# Altium PCB HandChip.PcbDoc
Units mil, origin at the board's own origin, x right, y up, seen from the top; angles counter-clockwise.
Board outline 3000 x 2000 mil, 2 copper layers (Top Layer, Bottom Layer); 30 components, 21 nets, 120 pads, 76 vias.
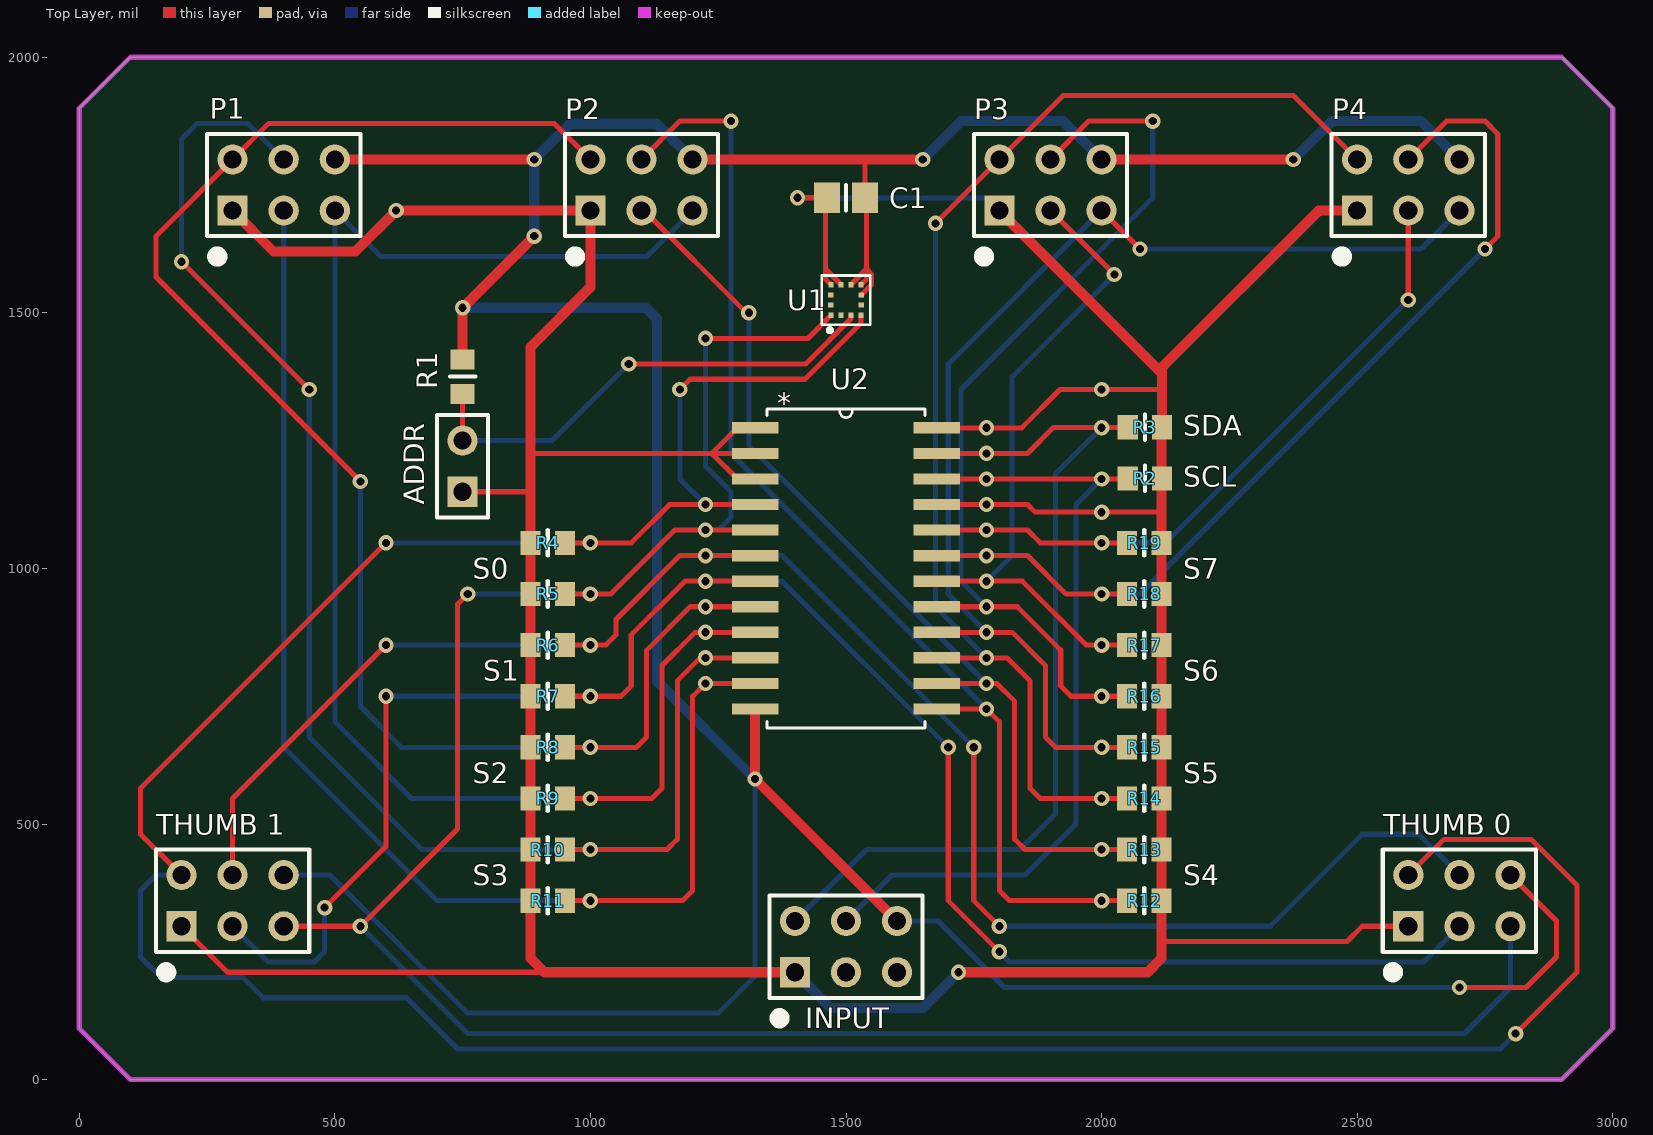
[diagram p0: Top Layer view]
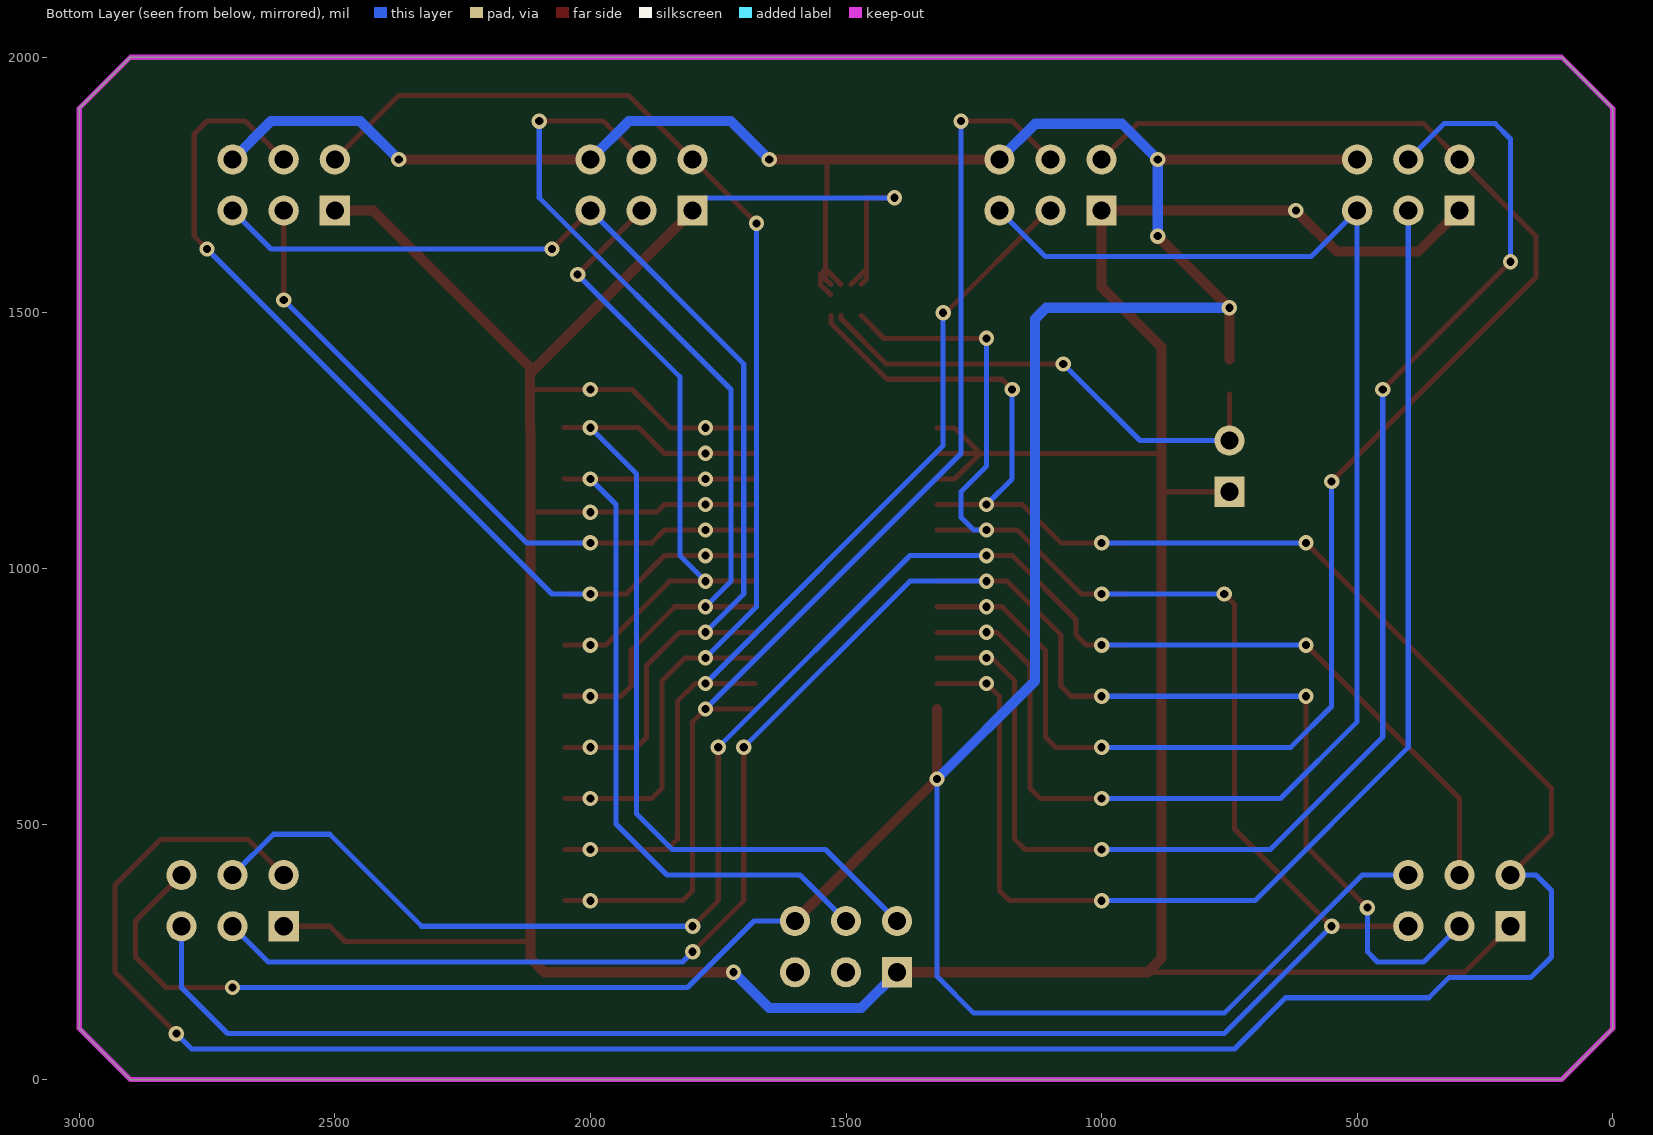
[diagram p1: Bottom Layer view, seen from below]

## Layer stack, top to bottom
Top Solder: solder mask 0.4, Solder Resist, Dk 3.5
Top Layer: signal copper 1.4
Dielectric 1: dielectric 12.6, FR-4, Dk 4.8
Bottom Layer: signal copper 1.4
Bottom Solder: solder mask 0.4, Solder Resist, Dk 3.5

## Board outline
100,0 0,100 0,1900 100,2000 2900,2000 3000,1900 3000,100 2900,0

## Design rules (kind name [scope] priority, off if disabled: settings)
Clearance "Clearance~Sunstone Circuits" [All] p1: gap=6 ignorepadtopadclearanceinfootprint=FALSE except(0: Arc-Hole Track-Hole SMDPad-Hole THPad-Hole Via-Hole Fill-Hole Poly-Hole Region-Hole Text-Hole) // Sunstone Circuits Minimum Clearance Rule (Double Sided)
HoleSize "HoleSize~Sunstone Circuits" [All] p1: absolutevalues=TRUE maxlimit=251 minlimit=16 maxpercent=80.000 minpercent=20.000 // SSC Hole Size Rule For Single Sided & Double Sided Designs.
HoleSize Testpoint [All] p2: absolutevalues=TRUE maxlimit=100 minlimit=1 maxpercent=80.000 minpercent=20.000
HoleSize TestPointUsage [All] p3: absolutevalues=TRUE maxlimit=100 minlimit=1 maxpercent=80.000 minpercent=20.000
MinimumAnnularRing "MinimumAnnularRing~Sunstone Circuits" [All] p1: minimumring=7 // Sunstone Circuits Minimum Annular Ring (Double Sided)
MinimumSolderMaskSliver [All] p1: minsoldermaskwidth=2
PlaneClearance "PlaneClearance~Sunstone Circuits" [All] p1: clearance=12 // Sunstone Circuits Power Plane Clearance Rule (Double Sided)
PlaneConnect "PlaneConnect~Sunstone Circuits" [All] p1: planeconnectstyle=Relief reliefexpansion=10 reliefentries=4 reliefconductorwidth=8 reliefairgap=10 // Sunstone Circuits Power Plane Connect Rule (Double Sided)
PolygonConnect "PolygonConnect~Sunstone Circuits" [All] p1: connectstyle=Relief reliefconductorwidth=8 reliefentries=4 polygonreliefangle="90 Angle" airgapwidth=10 // Sunstone Circuits Polygon Connect Style (Double Sided)
RoutingVias "RoutingVias~Sunstone Circuits" [All] p1: holewidth=16 width=30 viastyle="Through Hole" minholewidth=16 minwidth=30 maxholewidth=20 maxwidth=40 // Sunstone Circuits Routing Vias Rule (Double Sided)
ShortCircuit "ShortCircuit~Sunstone Circuits" [All] p1: allowed=FALSE // Sunstone Circuits Short Circuit Rule~Do Not Allow (Double Sided)
SilkToSilkClearance [All] p1: silktosilkclearance=1
SilkToSolderMaskClearance [IsPad] p1: minsilkscreentomaskgap=3 clearancetoexposedcopper=TRUE
SolderMaskExpansion "SolderMaskExpansion~Sunstone Circuits" [All] p1: expansion=3 // Sunstone Circuits Solder Mask Expansion Rule (Double Sided)
ViasUnderSMD "ViasUnderSMD~Sunstone Circuits" [All] p1: allowed=FALSE // Sunstone Circuits Vias Under SMD~Do Not Allow (Double Sided)
Width "Width~Sunstone Circuits" [All] p1: maxlimit=100 minlimit=6 preferedwidth=10 // Sunstone Circuits Minimum Width Rule (Double Sided)
23 further rules are at their usual default settings.

## Components (designator, comment, footprint, x,y, rotation, side; value= is the part's Value field where it differs from the comment)
ADDR "90120-0122" HDR1X2 750,1150 r90 top
C1 ".1uF" 0805 1500,1725 r180 top
INPUT "90131-0123" HDR2X3 1400,210 r0 top
P1 "90131-0123" HDR2X3 300,1700 r0 top
P2 "90131-0123" HDR2X3 1000,1700 r0 top
P3 "90131-0123" HDR2X3 1800,1700 r0 top
P4 "90131-0123" HDR2X3 2500,1700 r0 top
R1 "10k" 0805_RES_HD 750,1375 r270 top
R2 "2.4k" 0805_RES_HD 2084.54,1176 r180 top
R3 "2.4k" 0805_RES_HD 2084.54,1276 r180 top
R4 "2.4k" 0805_RES_HD 916.54,1050 r0 top
R5 "2.4k" 0805_RES_HD 916.54,950 r0 top
R6 "2.4k" 0805_RES_HD 916.54,850 r0 top
R7 "2.4k" 0805_RES_HD 916.54,750 r0 top
R8 "2.4k" 0805_RES_HD 916.54,650 r0 top
R9 "2.4k" 0805_RES_HD 916.54,550 r0 top
R10 "2.4k" 0805_RES_HD 916.54,450 r0 top
R11 "2.4k" 0805_RES_HD 916.54,350 r0 top
R12 "2.4k" 0805_RES_HD 2083.46,350 r180 top
R13 "2.4k" 0805_RES_HD 2083.46,450 r180 top
R14 "2.4k" 0805_RES_HD 2083.46,550 r180 top
R15 "2.4k" 0805_RES_HD 2083.46,650 r180 top
R16 "2.4k" 0805_RES_HD 2083.46,750 r180 top
R17 "2.4k" 0805_RES_HD 2083.46,850 r180 top
R18 "2.4k" 0805_RES_HD 2083.46,950 r180 top
R19 "2.4k" 0805_RES_HD 2083.46,1050 r180 top
"THUMB 0" "90131-0123" HDR2X3 2600,300 r0 top (schematic designator THUMB0)
"THUMB 1" "90131-0123" HDR2X3 200,300 r0 top (schematic designator THUMB1)
U1 "KX003-1077" *XDCR_KX003-1077 1500,1525 r90 top
U2 "PCA9548ADWR" DW24 1500,1000 r0 top

## Footprints (in the part's own frame and the unit in brackets; to place one, negate y for a bottom-side part, rotate by r counter-clockwise, add the part's x,y. Pads: shape width x height; smd on the part's side, far side on the other; paste and mask are expansions set on the pad)
0805 [mm] "Chip Capacitor; Body 2.0 x 1.2 mm (LxW typ)"
  rect 1.3x1.5 smd: 1(-0.95,0) 2(0.95,0)
  silkscreen extent 0,-0.64 0,0.64, body extent -1,-0.6 1,0.6, height 1.5
0805_RES_HD [mm] "Chip Resistor, 2-Leads, Body 2.00x1.25mm, IPC High Density"
  rect 1x1.2 smd: 1(-0.85,0) 2(0.85,0)
  silkscreen extent 0,-0.64 0,0.64, body extent -1.1,-0.68 1.1,0.67, height 0.65
*XDCR_KX003-1077 [mm]
  rect 0.275x0.25 smd: 1(-0.763,0.75) 2(-0.763,0.25) 3(-0.763,-0.25) 4(-0.763,-0.75) 7(0.763,-0.75) 8(0.763,-0.25) 9(0.763,0.25) 10(0.763,0.75)
  rect 0.25x0.275 smd: 5(-0.25,-0.763) 6(0.25,-0.763) 11(0.25,0.763) 12(-0.25,0.763)
  silkscreen extent -1.6,-1.2 1.22,1.2
DW24 [mil]
  rect 91x22 smd: 1(-178,275) 2(-178,225) 3(-178,175) 4(-178,125) 5(-178,75) 6(-178,25) 7(-178,-25) 8(-178,-75) 9(-178,-125) 10(-178,-175) 11(-178,-225) 12(-178,-275) 13(178,-275) 14(178,-225) 15(178,-175) 16(178,-125) 17(178,-75) 18(178,-25) 19(178,25) 20(178,75) 21(178,125) 22(178,175) 23(178,225) 24(178,275)
  silkscreen extent -154,-312 154,312
HDR1X2 [mm] "Connector; Header; 2 Position"
  rect 1.5x1.5 hole 0.9: 1(0,0)
  round 1.5 hole 0.9: 2(2.54,0)
  silkscreen extent -1.27,-1.27 3.81,1.27
HDR2X3 [mm] "Connector; Header; 3x2 Position"
  rect 1.5x1.5 hole 0.9: 1(0,0)
  round 1.5 hole 0.9: 2(0,2.54) 3(2.54,0) 4(2.54,2.54) 5(5.08,0) 6(5.08,2.54)
  silkscreen extent -1.27,-2.54 6.35,3.81, body extent -1.27,-1.27 6.35,3.81, height 8.42

## Part data
ADDR: "MOLEX CONN HEADER 2POS .100\" STR TIN", Manufacturer 1=Molex, Supplier Part Number 1=WM8072-ND, GFUPartNo=90120-0122, Manufacturer Part Number 1=90120-0122, Part Type=THRU, Supplier 1=Digi-Key
C1: library part CL21A475KPFNNNE, ".1, 10%, 50V", Manufacturer 1=Samsung, Supplier Part Number 1=1276-1259-1-ND, GFUPartNo=CL21A475KPFNNNE, Manufacturer Part Number 1=CL21A475KPFNNNE, PackageReference=0805, Part Type=SMT, Supplier 1=Digi-Key
INPUT P1 P2 P3 P4 "THUMB 0" "THUMB 1": "MOLEX CONN HEADER 6POS 2ROW .100\" STR TIN", Manufacturer 1=Molex, Supplier Part Number 1=WM8121-ND, GFUPartNo=90131-0123, Manufacturer Part Number 1=90131-0123, Part Type=THRU, Supplier 1=Digi-Key
R1 R2 R3 R4 R5 R6 R7 R8 R9 R10 R11 R12 R13 R14 R15 R16 R17 R18 R19: library part RC2012F752CS, "RES 10K OHM 1/8W 5% 0805", Manufacturer 1=Samsung, Supplier Part Number 1=1276-5324-1-ND, GFUPartNo=RC2012F752CS, Manufacturer Part Number 1=RC2012F752CS, Part Type=SMT, Supplier 1=Digi-Key
U1: "Accelerometer X, Y, Z Axis ±2g, 4g, 8g, 16g 3.5kHz _X,Y_, 1.8kHz _Z_ 12-LGA _2x2_", Package="VFLGA-12 Rohm Semiconductor", Digi-Key_Part_Number=KX003-1077CT-ND, Digi-Key_Purchase_URL=https://www.digikey.com/product-detail/en/rohm-semiconductor/KX003-1077/KX003-1077CT-ND/9679234?utm_source=snapeda&utm_medium=aggregator&utm_campaign=symbol, MF="Rohm Semiconductor", MP=KX003-1077, SnapEDA_Link=https://www.snapeda.com/parts/KX003-1077/Rohm/view-part/3603894/?ref=snap
U2: Manufacturer="Texas Instruments", Built_By=EMA_UL_Team, C="Copyright (C) 2015 Accelerated Designs. All rights reserved", Manufacturer_Part_Number=PCA9548ADWR, Vendor="Texas Instruments"

## Via types
v1: diameter 30, hole 16, Top Layer to Bottom Layer, 76 vias

## Nets (pads, with @x,y where several pads share a name; then routed paths per layer and width w, separated by ;. In a path a pad name is that pad's centre, name@x,y a point inside that pad or via, vN(x,y) a via of type N, cw(c..) or ccw(c..) an arc to the next point about the centre after c; other vN are vias at no path point)
3V3: "THUMB 0.1" "THUMB 1.1" ADDR.1 C1.2 INPUT.1 P1.1 P2.1 P3.1 P4.1 R2.1 R3.1 R4.1 R5.1 R6.1 R7.1 R8.1 R9.1 R10.1 R11.1 R12.1 R13.1 R14.1 R15.1 R16.1 R17.1 R18.1 R19.1 U1.9 U1.10 U2.1 U2.2 U2.3 U2.21 U2.24 | length 9335.2
  Top Layer w10: 200,300 290,210 910,210 ; ADDR.1 882.07,1150 883.07,1149 ; 883.07,1225 1237.5,1225 ; U2.3 1287.5,1175 1237.5,1225 ; U2.2 1237.5,1225 ; U2.1 1287.5,1275 1237.5,1225 ; v1(1405,1725) C1.2 1460,1722.4 1460,1585.51 ; U1.10 1470.47,1555.35 1460,1565.83 1460,1585.51 ; U1.9 1490.16,1555.35 1460,1585.51 ; U2.21 1855,1125 1870,1110 2117.46,1110 ; U2.24 1843.75,1275 1918.75,1350 2118,1350 ; 2116.93,280 2126.93,270 2480,270 2510,300 2600,300
  Top Layer w20: P1.1 380,1620 540,1620 v1(620,1700) P2.1 1000,1550 883.07,1433.07 883.07,1225 883.07,1149 R4.1 R5.1 R6.1 R7.1 R8.1 R9.1 R10.1 R11.1 883.07,236.93 910,210 INPUT.1 ; v1(1720,210) 2090,210 2116.93,236.93 2116.93,280 R12.1 R13.1 R14.1 R15.1 R16.1 R17.1 R18.1 R19.1 2117.46,1050.54 2117.46,1110 2117.46,1275.46 R3.1 2118,1350 2118,1382 ; P3.1 2118,1382 ; P4.1 2425,1700 2118,1393 2118,1382
  Bottom Layer w10: v1(1405,1725) 1405.47,1724.53 1775.47,1724.53 P3.1
  Bottom Layer w20: INPUT.1 1470,140 1650,140 v1(1720,210)
  other v1: 2000,1110 1775,1125 1775,1275 2000,1350
GND: "THUMB 0.6" "THUMB 1.6" C1.1 INPUT.6 P1.6 P2.6 P3.6 P4.6 R1.1 U1.6 U1.7 U1.8 U2.12 | length 8104.1
  Top Layer w10: U1.8 1509.84,1555.35 1540,1585.51 ; U1.7 1529.53,1555.35 1540,1565.83 1540,1585.51 ; U1.6 1530.35,1534.84 1530.43,1534.92 1530.43,1535.26 1550,1554.82 1550,1575.51 1540,1585.51 ; 1540,1800 1537.4,1797.4 C1.1 1540,1722.4 1540,1585.51 ; v1(2700,180) 2830,180 2890,240 2890,310 2800,400
  Top Layer w20: P1.6 v1(890,1800) ; R1.1 v1(750,1510) v1(890,1650) ; P2.6 1540,1800 v1(1650,1800) ; U2.12 v1(1322,588) INPUT.6 ; P3.6 v1(2375,1800)
  Bottom Layer w10: 400,400 490,400 760,130 1250,130 1322,202 v1(1322,588) ; INPUT.6 1680,310 1810,180 v1(2700,180)
  Bottom Layer w20: v1(750,1510) 1108.28,1510 1130,1488.28 1130,780 v1(1322,588) ; v1(890,1650) v1(890,1800) 960,1870 1130,1870 P2.6 ; v1(1650,1800) 1725,1875 1925,1875 P3.6 ; v1(2375,1800) 2450,1875 2625,1875 P4.6
NetADDR_2: ADDR.2 R1.2 U1.3 | length 956.5
  Top Layer w10: ADDR.2 R1.2 ; v1(1075,1400) 1421.07,1400 1509.76,1488.7 1509.76,1494.9 U1.3
  Bottom Layer w10: ADDR.2 925,1250 v1(1075,1400)
SCL0: "THUMB 0.5" "THUMB 1.5" R5.2 U1.1 U2.5 | length 4740.4
  Top Layer w10: 400,300 v1(550,300) 740,490 740,930 v1(760,950) ; R5.2 v1(1000,950) 1040,950 1165,1075 v1(1225,1075) U2.5 ; v1(1225,1450) 1425.49,1450 1470.06,1494.57 1470.39,1494.57 1470.47,1494.65 U1.1
  Bottom Layer w10: v1(550,300) 760,90 2710,90 2800,180 2800,300 ; v1(760,950) v1(1000,950) ; v1(1225,1075) 1250,1075 1275,1100 1275,1150 1225,1200 v1(1225,1450)
SCL1: "THUMB 0.3" "THUMB 1.3" R7.2 U2.7 | length 3679.1
  Top Layer w10: v1(480,336.34) 600,456.34 v1(600,750) ; R7.2 v1(1000,750) 1060,750 1080,770 1080,870 1185,975 v1(1225,975) U2.7 ; v1(1700,650) 1700,350 v1(1800,250)
  Bottom Layer w10: 300,300 370,230 460,230 480,250 v1(480,336.34) ; v1(600,750) v1(1000,750) ; v1(1225,975) 1375,975 v1(1700,650) ; v1(1800,250) 1820,230 2630,230 2700,300
SCL2: P1.5 P2.5 R9.2 U2.9 | length 2983.9
  Top Layer w10: R9.2 v1(1000,550) 1120,550 1140,570 1140,810 1205,875 v1(1225,875) U2.9
  Bottom Layer w10: v1(1000,550) 650,550 500,700 P1.5 590,1610 1110,1610 P2.5
SCL3: P1.3 R11.2 U2.11 | length 2544.9
  Top Layer w10: R11.2 v1(1000,350) 1180,350 1200,370 1200,750 v1(1225,775) U2.11
  Bottom Layer w10: P1.3 400,650 700,350 v1(1000,350)
SCL4: P2.3 R13.2 U2.14 | length 1875.2
  Top Layer w10: P2.3 1105,1700 1305,1500 v1(1310,1500) ; U2.14 v1(1775,775) 1795,775 1830,740 1830,470 1850,450 R13.2
  Bottom Layer w10: v1(1310,1500) 1310,1240 v1(1775,775)
  other v1: 2000,450 1775,775
SCL5: P3.5 P4.5 R15.2 U2.16 | length 2289.7
  Top Layer w10: U2.16 v1(1775,875) 1825,875 1890,810 1890,670 1910,650 R15.2 ; P3.5 v1(2075,1625)
  Bottom Layer w10: v1(1775,875) 1700,950 1700,1400 P3.5 ; v1(2075,1625) 2625,1625 P4.5
  other v1: 2000,650
SCL6: P3.3 R17.2 U2.18 | length 1304.1
  Top Layer w10: U2.18 v1(1775,975) 1845,975 1970,850 R17.2 ; P3.3 v1(2025,1575)
  Bottom Layer w10: v1(1775,975) 1825,1025 1825,1375 v1(2025,1575)
  other v1: 2000,850
SCL7: P4.3 R19.2 U2.20 | length 1354.1
  Top Layer w10: U2.20 1855,1075 1880,1050 v1(2000,1050) R19.2 ; v1(2600,1525) P4.3
  Bottom Layer w10: v1(2000,1050) 2125,1050 v1(2600,1525)
  other v1: 1775,1075
SCL_in: INPUT.4 R2.2 U2.22 | length 1597.9
  Top Layer w10: U2.22 v1(1775,1175) v1(2000,1175) 2050.07,1175 R2.2
  Bottom Layer w10: INPUT.4 1590,400 1850,400 1950,500 1950,1125 v1(2000,1175)
SDA0: "THUMB 0.2" "THUMB 1.2" R4.2 U1.4 U2.4 | length 6089.8
  Top Layer w10: 200,400 120,480 120,570 v1(600,1050) ; R4.2 v1(1000,1050) 1080,1050 1155,1125 v1(1225,1125) U2.4 ; v1(1175,1350) 1195,1370 1420,1370 1529.45,1479.45 1529.45,1494.9 U1.4 ; 2600,400 2670,470 2840,470 2930,380 2930,210 v1(2810,90)
  Bottom Layer w10: 200,400 150,400 120,370 120,240 160,200 320,200 360,160 640,160 740,60 2780,60 v1(2810,90) ; v1(600,1050) v1(1000,1050) ; v1(1175,1350) 1175,1175 v1(1225,1125)
SDA1: "THUMB 0.4" "THUMB 1.4" R6.2 U2.6 | length 3495.1
  Top Layer w10: 300,400 300,550 v1(600,850) ; R6.2 v1(1000,850) 1030,850 1050,870 1050,900 1175,1025 v1(1225,1025) U2.6 ; v1(1750,650) 1750,350 v1(1800,300)
  Bottom Layer w10: v1(600,850) v1(1000,850) ; v1(1225,1025) 1375,1025 v1(1750,650) ; v1(1800,300) 2330,300 2510,480 2620,480 2700,400
SDA2: P1.2 P2.2 R8.2 U2.8 | length 3124.4
  Top Layer w10: v1(550,1170) 150,1570 150,1650 P1.2 370,1870 930,1870 P2.2 ; R8.2 v1(1000,650) 1090,650 1110,670 1110,840 1195,925 U2.8
  Bottom Layer w10: v1(550,1170) 550,730 630,650 v1(1000,650)
  other v1: 1225,925
SDA3: P1.4 R10.2 U2.10 | length 2865
  Top Layer w10: v1(200,1600) v1(450,1350) ; R10.2 v1(1000,450) 1150,450 1170,470 1170,780 1215,825 U2.10
  Bottom Layer w10: v1(200,1600) 200,1840 230,1870 330,1870 P1.4 ; v1(450,1350) 450,670 670,450 v1(1000,450)
  other v1: 1225,825
SDA4: P2.4 R12.2 U2.13 | length 2283.8
  Top Layer w10: P2.4 1175,1875 v1(1275,1875) ; U2.13 v1(1775,725) 1800,700 1800,370 1820,350 R12.2
  Bottom Layer w10: v1(1275,1875) 1275,1225 v1(1775,725)
  other v1: 2000,350
SDA5: P3.2 P4.2 R14.2 U2.15 | length 2480.7
  Top Layer w10: v1(1675,1675) P3.2 1925,1925 2375,1925 P4.2 ; U2.15 v1(1775,825) 1815,825 1860,780 1860,570 1880,550 R14.2
  Bottom Layer w10: v1(1675,1675) 1675,925 v1(1775,825)
  other v1: 2000,550
SDA6: P3.4 R16.2 U2.17 | length 1842.6
  Top Layer w10: U2.17 v1(1775,925) 1835,925 1920,840 1920,770 1940,750 R16.2 ; P3.4 1975,1875 v1(2100,1875)
  Bottom Layer w10: v1(1775,925) 1725,975 1725,1350 2100,1725 v1(2100,1875)
  other v1: 2000,750
SDA7: P4.4 R18.2 U2.19 | length 1884.4
  Top Layer w10: U2.19 1855,1025 1930,950 v1(2000,950) R18.2 ; P4.4 2675,1875 2750,1875 2775,1850 2775,1650 v1(2750,1625)
  Bottom Layer w10: v1(2000,950) 2075,950 v1(2750,1625)
  other v1: 1775,1025
SDA_in: INPUT.2 R3.2 U2.23 | length 1783.5
  Top Layer w10: U2.23 1855,1225 1906,1276 R3.2
  Bottom Layer w10: INPUT.2 1540,450 1840,450 1910,520 1910,1185 v1(2000,1275)
  other v1: 1775,1225
pads on no net: INPUT.3 INPUT.5 U1.2 U1.5 U1.11 U1.12

## Keep-outs
Keep-Out Layer:
  the board outline again, w10

## Silkscreen, mask and mechanical layers (free items; w line width, h text height)
Top Overlay:
  text "SDA" at 2160,1260 h40
  text "SCL" at 2160,1160 h40
  text "S0" at 770,980 h40
  text "S7" at 2160,980 h40
  text "S1" at 790,780 h40
  text "S6" at 2160,780 h40
  text "S2" at 770,580 h40
  text "S5" at 2160,580 h40
  text "S3" at 770,380 h40
  text "S4" at 2160,380 h40

## Text inside footprints (layer, text, board x,y; h text height)
U2: Top Overlay "*" at 1365.5,1304 h40